# Altium PCB Tracking-Car.PcbDoc
Units mil, origin at the board's own origin, x right, y up, seen from the top; angles counter-clockwise.
Board outline 1945 x 1955 mil, 2 copper layers (Top Layer, Bottom Layer); 45 components, 45 nets, 193 pads, 18 vias.
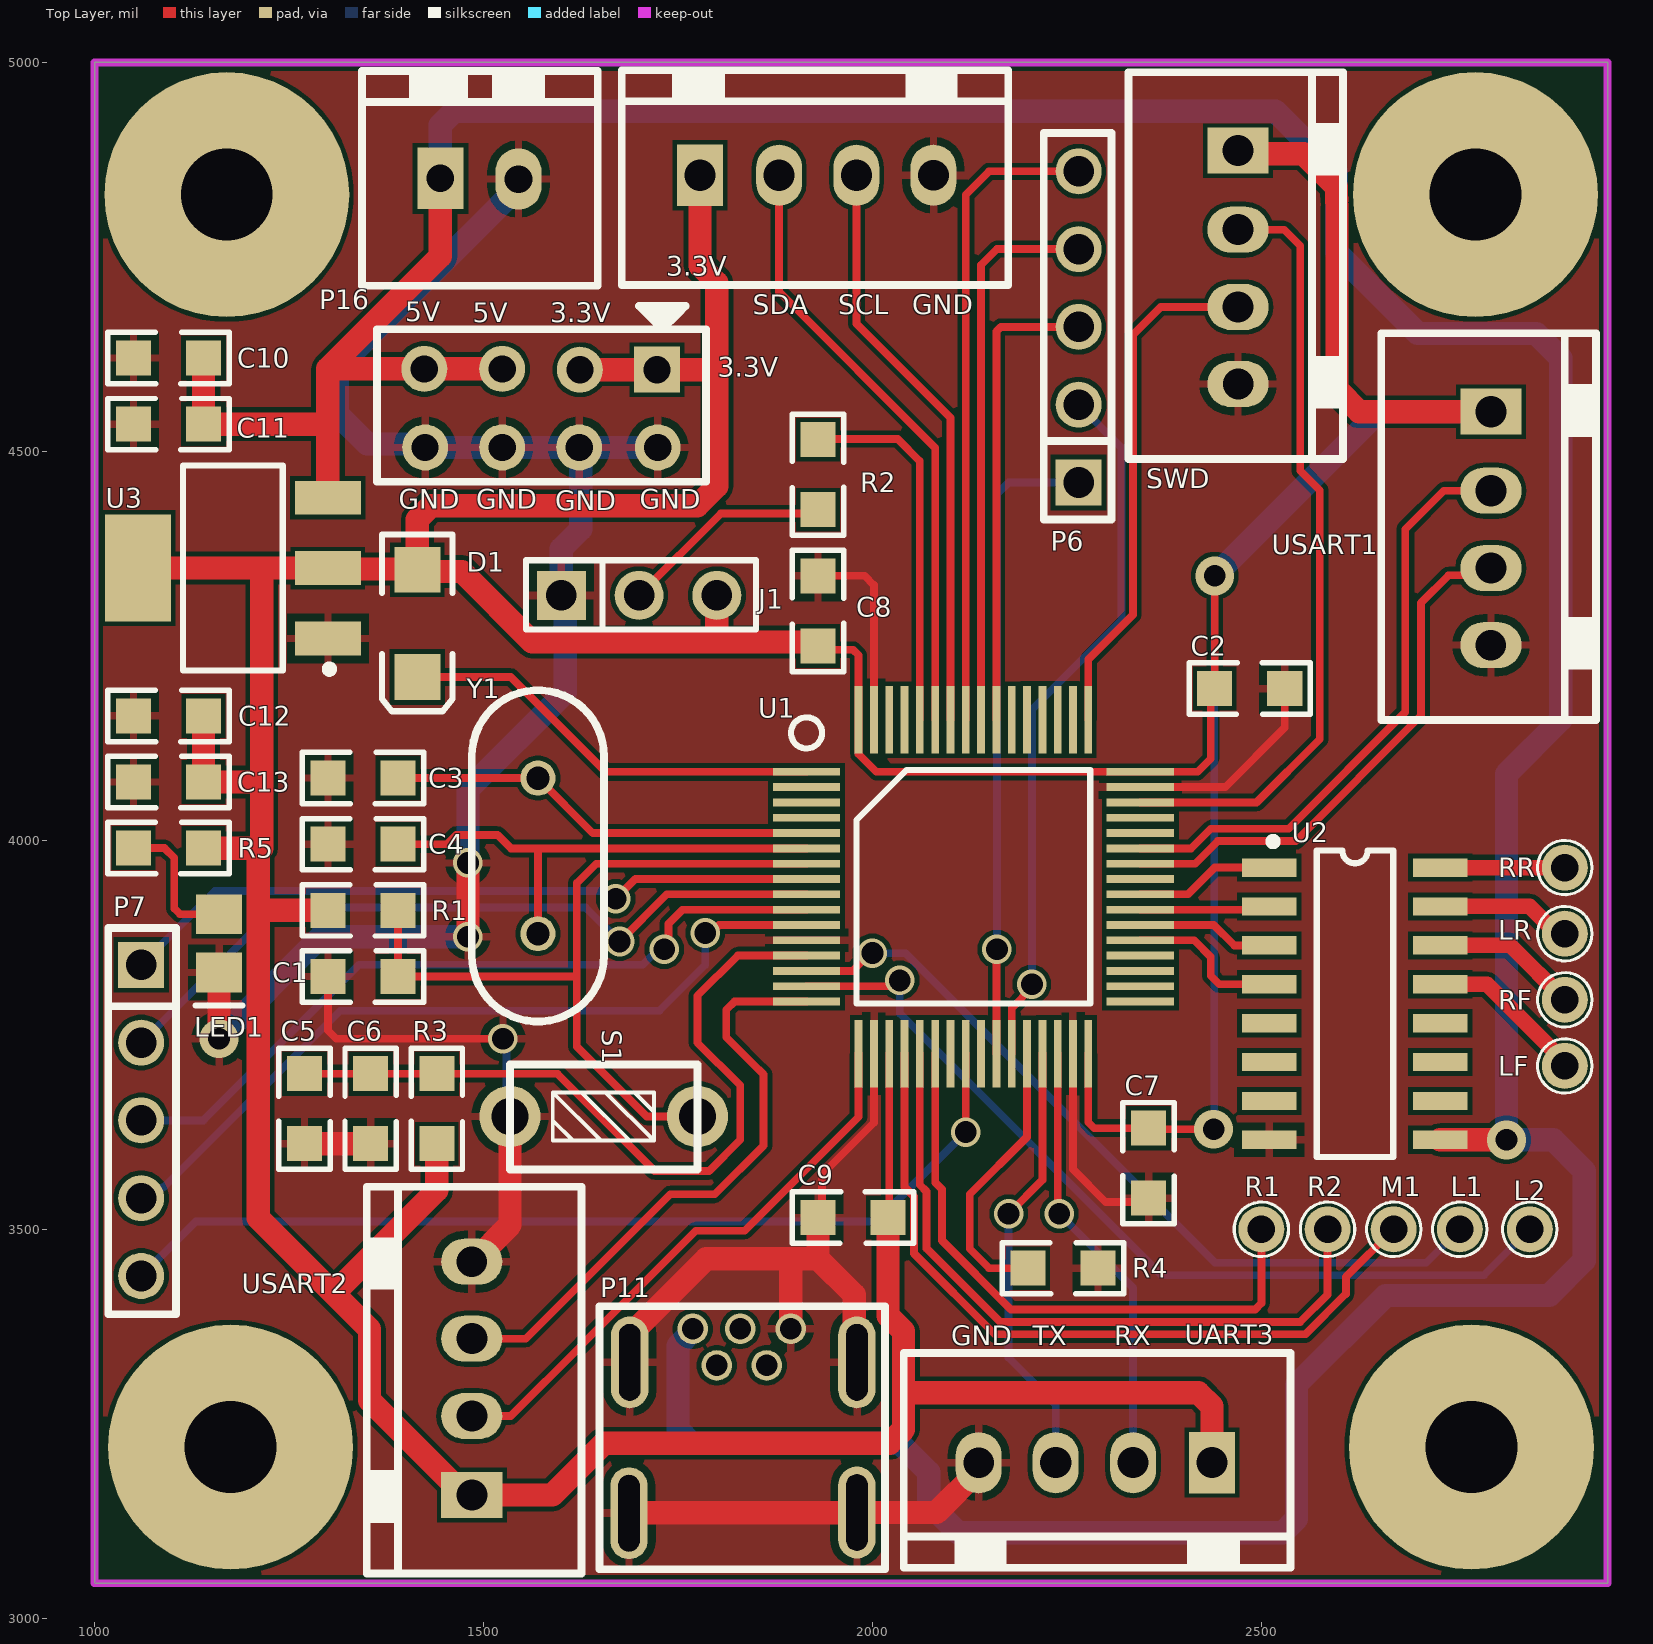
[diagram p0: Top Layer view]
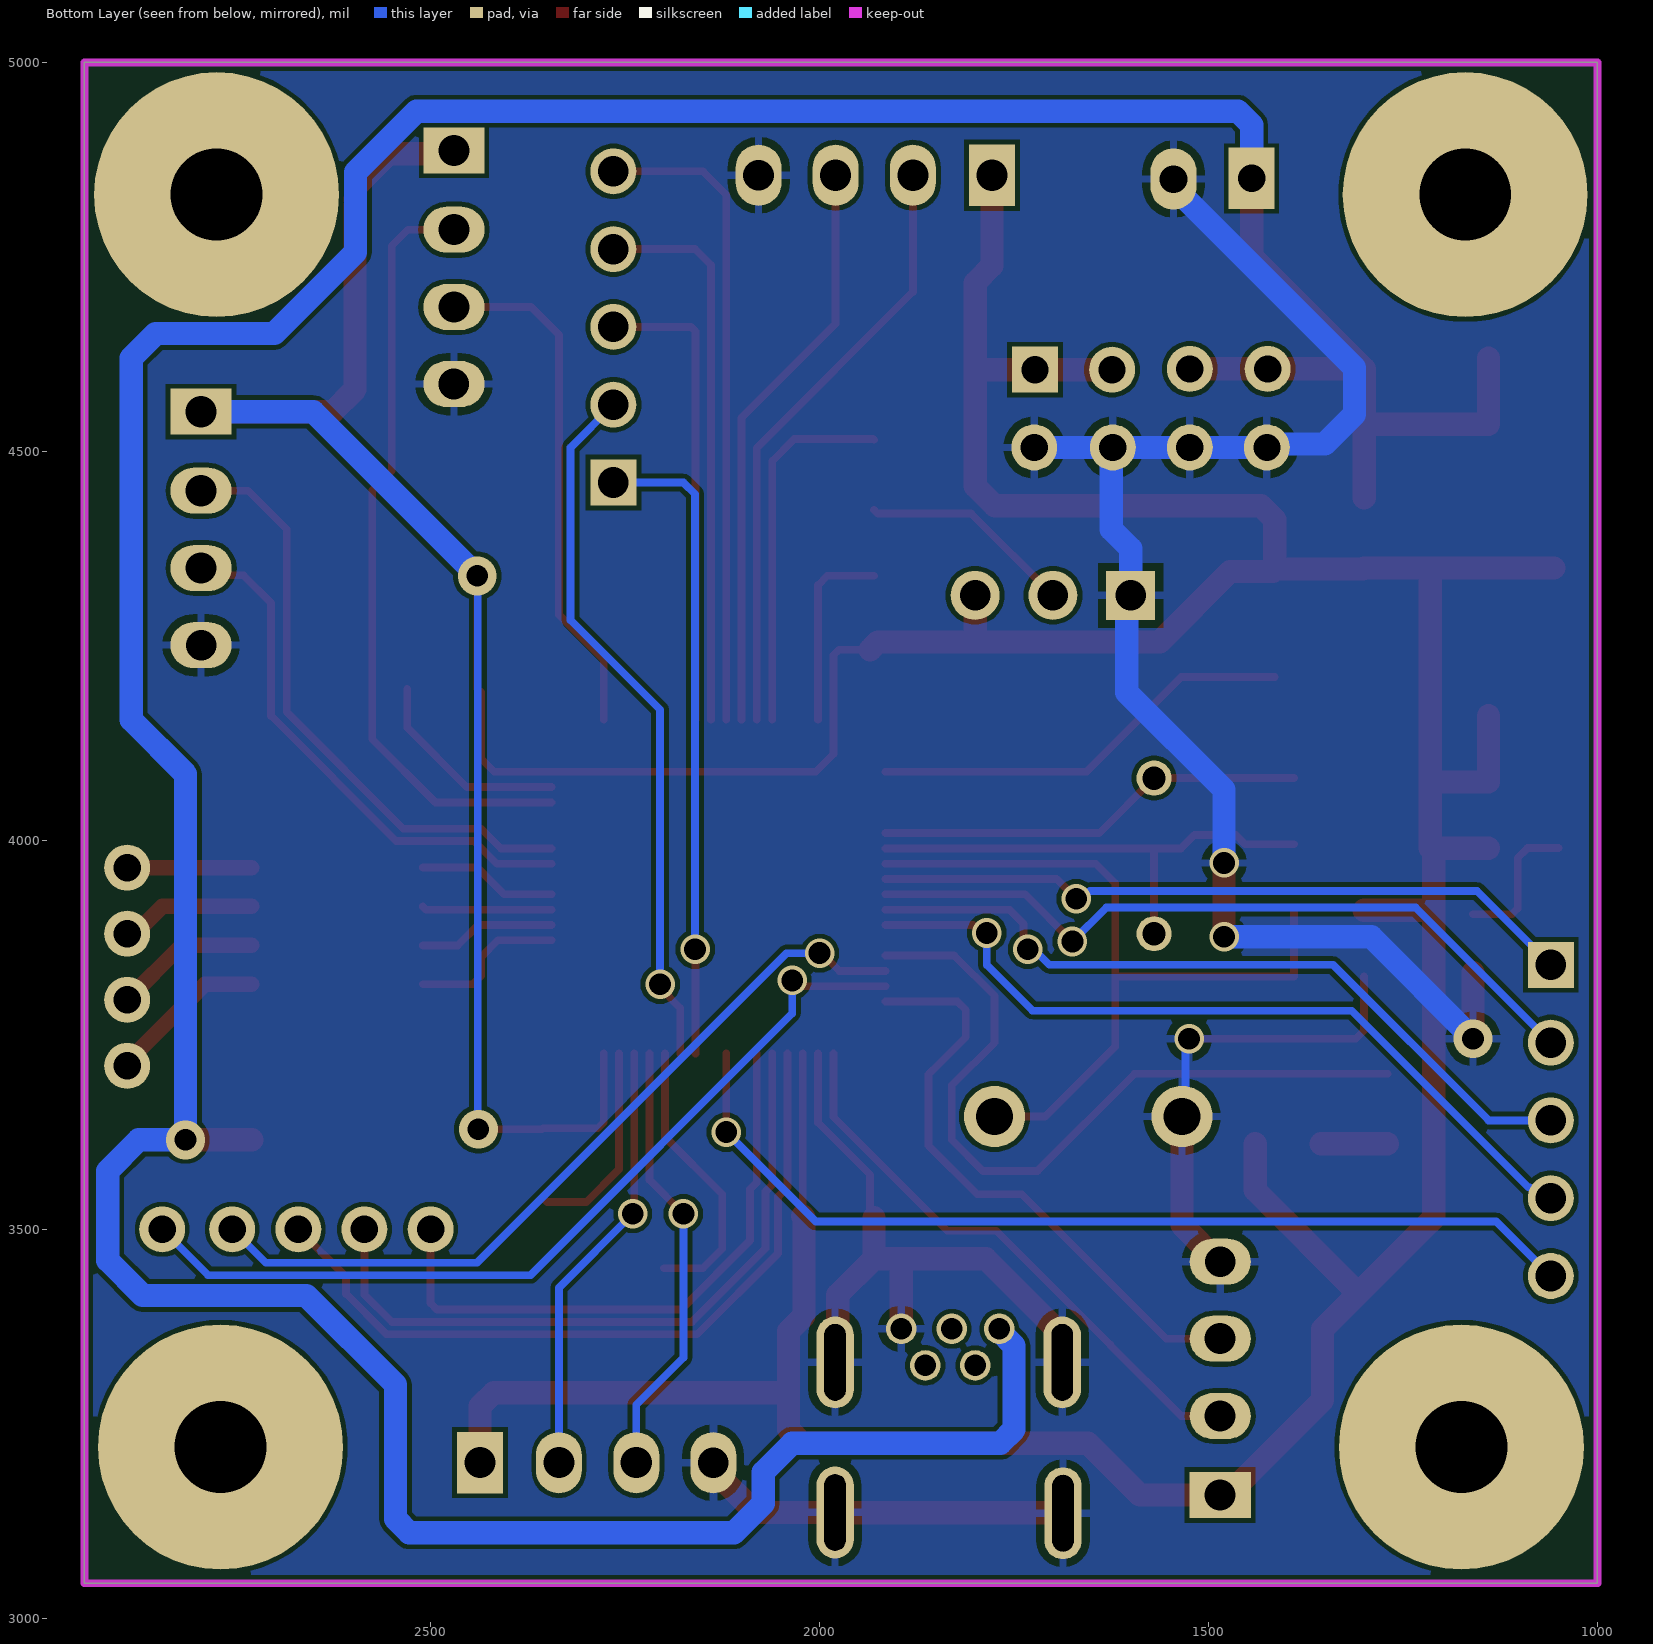
[diagram p1: Bottom Layer view, seen from below]

## Layer stack, top to bottom
Top Solder: solder mask 0.4, Solder Resist, Dk 3.5
Top Layer: signal copper 1.4
Dielectric 1: dielectric 12.6, FR-4, Dk 4.8
Bottom Layer: signal copper 1.4
Bottom Solder: solder mask 0.4, Solder Resist, Dk 3.5

## Board outline
1000,3045 1000,5000 2945,5000 2945,3045

## Design rules (kind name [scope] priority, off if disabled: settings)
Clearance [All] p1: gap=6 ignorepadtopadclearanceinfootprint=FALSE
HoleSize [All] p1: absolutevalues=TRUE maxlimit=900 minlimit=1 maxpercent=80.000 minpercent=20.000
MinimumSolderMaskSliver [All] p1: minsoldermaskwidth=0
PolygonConnect [All] p1: connectstyle=Relief reliefconductorwidth=10 reliefentries=4 polygonreliefangle="90 Angle" airgapwidth=10
RoutingVias [All] p1: holewidth=28 width=38 viastyle="Through Hole" minholewidth=28 minwidth=50 maxholewidth=28 maxwidth=50
SilkToSilkClearance [All] p1: silktosilkclearance=0
SilkToSolderMaskClearance [IsPad] p1: minsilkscreentomaskgap=0 clearancetoexposedcopper=TRUE
SolderMaskExpansion [All] p1: expansion=4 istentingtop=FALSE
Width 3.3V [InNet('3.3V')] p1: maxlimit=40 minlimit=10 preferedwidth=20 minimp=50.000000 maximp=50.000000 favimp=50.000000
Width 5V [InNet('5V')] p2: maxlimit=40 minlimit=10 preferedwidth=20 minimp=50.000000 maximp=50.000000 favimp=50.000000
Width GND [InNet('GND')] p3: maxlimit=40 minlimit=10 preferedwidth=20 minimp=50.000000 maximp=50.000000 favimp=50.000000
Width [All] p4: maxlimit=40 minlimit=10 preferedwidth=10
26 further rules are at their usual default settings.

## Components (designator, comment, footprint, x,y, rotation, side; value= is the part's Value field where it differs from the comment)
3.3V "XH2.54-4" VH2.54_4 1778.43,4855 r180 top (schematic designator P2)
5V "双排插针 2.54 2*4" "双排插针 2.54 2*4" 1724,4605 r270 top (schematic designator P13)
C1 "104" 0805 1300,3825 r0 top
C2 "104" 0805 2530,4195 r180 top
C3 "22P" 0805 1300,4080 r0 top
C4 "22P" 0805 1300,3995 r0 top
C5 "10uF" 0805 1270,3700 r270 top
C6 "104" 0805 1355,3700 r270 top
C7 "104" 0805 2355,3630 r270 top
C8 "104" 0805 1930,4250 r90 top
C9 "104" 0805 2020,3515 r180 top
C10 "10uF" 0805 1050,4620 r0 top
C11 "104" 0805 1050,4535 r0 top
C12 "10uF" 0805 1050,4160 r0 top
C13 "104" 0805 1050,4075 r0 top
D1 "1N4148" "二极管 贴片 IN4148" 1415,4347.8 r270 top
J1 "跳线" "单排插针 2.54 1*3" 1600,4315 r0 top
L1 "TEST" 焊盘 2755,3500 r0 top (schematic designator P14)
L2 "TEST" 焊盘 2845,3500 r0 top (schematic designator P15)
LED1 "红色" LED0805 1160,3905 r270 top
LF "TEST" 焊盘 2890,3710 r0 top (schematic designator P12)
LR "TEST" 焊盘 2890,3880 r0 top (schematic designator P9)
M1 "TEST" 焊盘 2670,3500 r0 top (schematic designator P17)
P6 "2.54 1*5" "单排插针 2.54 1*5" 2265,4460 r90 top
P7 "2.54 1*5" "单排插针 2.54 1*5" 1060,3840 r270 top
P11 "USB-MINI座" "USB MINI DIP" 1769,3372 r90 top
P16 "XH2.54-2" VH2.54_2 1444.61,4850.98 r180 top
R1 "10K" 0805 1300,3910 r0 top
R1 "TEST" 焊盘 2500,3500 r0 top (schematic designator P19)
R2 "100K" 0805 1930,4425 r90 top
R2 "TEST" 焊盘 2585,3500 r0 top (schematic designator P18)
R3 "10R" 0805 1440,3700 r270 top
R4 "100K" 0805 2200,3450 r0 top
R5 "100K" 0805 1050,3990 r0 top
RF "TEST" 焊盘 2890,3795 r0 top (schematic designator P10)
RR "TEST" 焊盘 2890,3965 r0 top (schematic designator P8)
S1 "key" "按键 轻触  6*3" 1534,3645 r90 top
SWD "XH2.54-4" VH2.54_4 2470,4886.57 r90 top (schematic designator P1)
U1 "STM32F103RCT6" LQFP64 1915.28,4088.07 r0 top
U2 "贴片芯片 ULN2003A" SOIC16 2515,3965 r270 top
U3 "SPX1117M3-3.3" SOT223 1299.95,4259 r90 top
UART3 "XH2.54-4" VH2.54_4 2436.57,3200 r0 top (schematic designator P5)
USART1 "XH2.54-4" VH2.54_4 2795,4551 r90 top (schematic designator P4)
USART2 "XH2.54-4" VH2.54_4 1485,3158.43 r270 top (schematic designator P3)
Y1 "0" "晶振 BCY-W2/E4.7" 1570,3880 r90 top

## Footprints (in the part's own frame and the unit in brackets; to place one, negate y for a bottom-side part, rotate by r counter-clockwise, add the part's x,y. Pads: shape width x height; smd on the part's side, far side on the other; paste and mask are expansions set on the pad)
0805 [mil]
  rect 45x45 smd: 1(0,0) 2(90,0)
  silkscreen extent -33,-33 123,33
LED0805 [mm] "Chip Capacitor; Body 2.0 x 1.2 mm (LxW typ)"
  rect 1.3x1.5 smd: 1(0,0) 2(1.9,0)
  silkscreen extent 2.98,-0.76 2.98,0.76
LQFP64 [mm]
  rect 2.2x0.254 smd: 1(0,0) 2(0,-0.5) 3(0,-1) 4(0,-1.5) 5(0,-2) 6(0,-2.5) 7(0,-3) 8(0,-3.5) 9(0,-4) 10(0,-4.5) 11(0,-5) 12(0,-5.5) 13(0,-6) 14(0,-6.5) 15(0,-7) 16(0,-7.5) 33(10.9,-7.5) 34(10.9,-7) 35(10.9,-6.5) 36(10.9,-6) 37(10.9,-5.5) 38(10.9,-5) 39(10.9,-4.5) 40(10.9,-4) 41(10.9,-3.5) 42(10.9,-3) 43(10.9,-2.5) 44(10.9,-2) 45(10.9,-1.5) 46(10.9,-1) 47(10.9,-0.5) 48(10.9,0)
  rect 0.254x2.2 smd: 17(1.7,-9.2) 18(2.2,-9.2) 19(2.7,-9.2) 20(3.2,-9.2) 21(3.7,-9.2) 22(4.2,-9.2) 23(4.7,-9.2) 24(5.2,-9.2) 25(5.7,-9.2) 26(6.2,-9.2) 27(6.7,-9.2) 28(7.2,-9.2) 29(7.7,-9.2) 30(8.2,-9.2) 31(8.7,-9.2) 32(9.2,-9.2) 49(9.2,1.7) 50(8.7,1.7) 51(8.2,1.7) 52(7.7,1.7) 53(7.2,1.7) 54(6.7,1.7) 55(6.2,1.7) 56(5.7,1.7) 57(5.2,1.7) 58(4.7,1.7) 59(4.2,1.7) 60(3.7,1.7) 61(3.2,1.7) 62(2.7,1.7) 63(2.2,1.7) 64(1.7,1.7)
  silkscreen extent -0.51,-7.56 9.26,1.78
SOIC16 [mil] "Small Outline; 16 Leads; Body Width 3.9 mm; Pitch 1.27 mm"
  rect 23.62x70 smd: 1(0,-5) 2(50,-5) 3(100,-5) 4(150,-5) 5(200,-5) 6(250,-5) 7(300,-5) 8(350,-5) 9(350,215) 10(300,215) 11(250,215) 12(200,215) 13(150,215) 14(100,215) 15(50,215) 16(0,215)
  silkscreen extent -38,-5 372,155
SOT223 [mm] "SOT-223/SC-73; 4 Leads; Body 6.7 x 7.3 mm, inc. leads (LxW max)"
  rect 1.1x2.15 smd: 1(0.011,-0.001) 2(2.311,-0.001) 3(4.611,-0.001)
  rect 3.5x2.15 smd: 4(2.311,6.199)
  silkscreen extent -1.11,-0.18 5.66,4.72
"USB MINI DIP" [mm]
  round 1 hole 0.7: 1(0,0) 2(-1.194,-0.787) 3(0,-1.549) 4(-1.194,-2.413) 5(0,-3.2)
  oval 3x1.22 hole 0.7 slot 2.5 at 0 deg: 6(-1.093,-5.36) 7(-5.995,-5.36) 8(-1.093,2.057) 9(-6.02,2.082)
  silkscreen extent -7.85,-6.27 0.74,3.05
VH2.54_2 [mm]
  rect 1.5x2 hole 0.9: 1(0,0)
  oval 1.5x2 hole 0.9: 2(-2.55,0.025)
  silkscreen extent -5.14,-3.51 2.56,3.51
VH2.54_4 [mm]
  rect 1.5x2 hole 1.016: 1(0,0)
  oval 1.5x2 hole 1.016: 2(-2.58,0) 3(-5.105,0)
  oval 1.5x2 hole 1: 4(-7.62,0)
  silkscreen extent -10.06,-3.43 2.56,3.58
"二极管 贴片 IN4148" [mm] "SMT LED; 2 Flat Leads"
  rect 1.5x1.5 smd: 1(0,0) 2(3.5,0)
  silkscreen extent -1.15,-1.15 4.62,1.15
"单排插针 2.54 1*3" [mm]
  rect 1.6x1.6 hole 1: 1(0,0)
  round 1.6 hole 1: 2(2.54,0) 3(5.08,0)
  silkscreen extent -1.15,-1.12 6.36,1.14
"单排插针 2.54 1*5" [mm]
  rect 1.5x1.5 hole 1: 1(0,0)
  round 1.5 hole 1: 2(2.54,0) 3(5.08,0) 4(7.62,0) 5(10.16,0)
  silkscreen extent -1.2,-1.07 11.41,1.14
"双排插针 2.54 2*4" [mm]
  rect 1.5x1.5 hole 0.889: 1(0,-0.025)
  round 1.5 hole 0.889: 2(2.54,0) 3(0,-2.54) 4(2.54,-2.565) 5(-0.025,-5.08) 6(2.54,-5.08) 7(-0.025,-7.62) 8(2.54,-7.595)
  silkscreen extent -2.08,-9.17 3.66,1.57
"按键 轻触  6*3" [mm]
  round 2 hole 1.2: 1(0,0) 2(0,-6.121)
  silkscreen extent -1.73,-6.12 1.7,0
"晶振 BCY-W2/E4.7" [mil] "Quartz Crystal, Thru-Hole; 2 Leads; Body 11.35 x 4.65 x 13.46 mm (LxWxH max)"
  round 45 hole 30: 1(0,0) 2(200,0)
  silkscreen extent -113,-85 313,85
焊盘 [mm]
  round 1.5 hole 0.9: 1(0,0)
  silkscreen extent -0.89,-0.89 0.89,0.89

## Part data
3.3V SWD UART3 USART1 USART2: library part "联结件 XH2.54-4", 单位=套, 名称=联结件, 封装=XH2.54-4
5V: library part "联结件 双排插针 2.54 2*4", 单位=个, 名称=联结件, 封装=直插
C1 C2 C3 C4 C5 C6 C7 C8 C9 C10 C11 C12 C13: library part "电容 贴片 0805", 单位=个, 名称=贴片电容, 封装=0805
D1: library part "二极管 贴片 1N4148", 单位=个, 名称=贴片二极管, 封装=贴片
J1: library part "联结件 跳线端子 2.54-3", 单位=个, 名称=跳线插针, 封装=直插
L1 L2 LF LR M1 R1 R2 RF RR: library part 焊盘, 单位=个, 名称=焊盘, 封装=直插
LED1: library part "二极管 贴片发光 0805", 单位=个, 名称=贴片发光二极管, 封装=0805
P6 P7: library part "联结件 单排插针 2.54 1*5", 单位=片, 名称=单排插针, 封装=DIP
P11: library part "联结件 USB-MINI座", 单位=个, 名称=联结件, 封装=440068
P16: library part "联结件 XH2.54-2", 单位=套, 名称=联结件, 封装=VH3.96-2
R1 R2 R3 R4 R5: library part "电阻 贴片 0805", 单位=个, 名称=贴片电阻, 封装=0805
S1: library part "按键 轻触 3*6", 单位=个, 名称=开关, 封装="直插 12*12*12"
U1: library part "贴片芯片 STM32F103RCT6", "单片机", 单位=片, 名称=芯片, 封装=LQFP64
U3: library part "贴片芯片 SPX1117M3-3.3", "LDO", 单位=个, 名称=贴片芯片, 封装=SOT223
Y1: library part "晶振 直插矮", 单位=个, 名称=晶振, 封装=直插矮
U2: 单位=片, 名称=贴片芯片, 封装=SOIC16

## Free pads (board coordinates)
  round 314.96 hole 118.11: 3(1170,4830) 4(2775,4830) 5(1175,3220) 6(2770,3220)

## Via types
v1: diameter 38, hole 28, Top Layer to Bottom Layer, 14 vias
v2: diameter 50, hole 28, Top Layer to Bottom Layer, 4 vias

## Nets (pads, with @x,y where several pads share a name; then routed paths per layer and width w, separated by ;. In a path a pad name is that pad's centre, name@x,y a point inside that pad or via, vN(x,y) a via of type N, cw(c..) or ccw(c..) an arc to the next point about the centre after c; other vN are vias at no path point)
3.3V: 3.3V.1 5V.1 5V.3 C2.2 C7.1 C8.1 C9.1 C12.2 C13.2 D1.1 J1.3 R1.1@1300,3910 R3.2 R5.2 SWD.1 U1.19 U1.32 U1.48 U1.64 U3.2 U3.4 UART3.1 USART1.1 USART2.1 | length 8383.8
  Top Layer w10: C8.1@1935,4245 1975,4245 1982.21,4237.79 U1.64 1982.21,4110.82 2004.95,4088.07 U1.48 2418.07,4088.07 2435,4105 2435,4190 C2.2 v2(2440,4340) ; C9.1@2021.58,3516.57 U1.19 ; U1.32 2277.48,3637.52 2285,3630 C7.1 2356.41,3628.59 v2(2438.59,3628.59)
  Top Layer w30: U3.4 1215,4350 ; R5.2 1215,3990 1215,4075 ; C12.2 C13.2 1215,4075 ; 1210.53,3990 1210.53,3910 ; R1.1@1300,3910 1210.53,3910 ; R3.2 1440,3550 1307.5,3417.5 ; 5V.3 5V.1 1795,4605 1800,4610 ; 3.3V.1 1778.43,4738.43 1800,4716.85 1800,4610 ; J1.3 1800,4255 ; C8.1@1935,4245 C8.1 1925,4255 1800,4255 ; C9.1@2021.58,3516.57 C9.1 2020,3388.79 2040,3368.79 2040,3290 ; UART3.1 2436.57,3272.43 2419,3290 2040,3290 ; SWD.1 2494.37,4882.57 2554.1,4882.57 2579.45,4857.23 2596.53,4840.14 2596.53,4832.11 ccw(c2775,4830) 2597.19,4814.5 2597.19,4579.48 2625.67,4551 USART1.1 ; 1210.53,3910 1210.53,3514.47 1307.5,3417.5 ; 1215,4075 1215,4350 ; 1215,4350 U3.2 1301.1,4348.9 1413.9,4348.9 D1.1 ; 1307.5,3417.5 1353.48,3371.52 1353.48,3280.1 1475.16,3158.43 USART2.1 1588.43,3158.43 1655,3225 2022.43,3225 2040,3242.57 2040,3290 ; D1.1 1417.11,4345.68 1471.95,4345.68 1562.64,4255 1800,4255 ; D1.1 1415,4412.43 1432.57,4430 1775,4430 1800,4455 1800,4610
  Bottom Layer w10: v2(2438.59,3628.59) 2439.3,3629.3 2439.3,4339.3 v2(2440,4340)
  Bottom Layer w30: v2(2440,4340) 2651,4551 USART1.1
5V: 5V.5 5V.7 C10.2 C11.2 P11.1 P16.1 U2.9 U3.3 | length 5625.1
  Top Layer w30: C10.2 C11.2 1297.78,4535 1300,4532.78 ; U3.3 1300,4532.78 ; P16.1 1444.61,4750.61 1300,4606 ; 5V.5 1300,4606 ; U2.9 v2(2815,3615) ; 1300,4532.78 1300,4606
  Bottom Layer w30: P16.1 1444.61,4919.53 1462.18,4937.1 2518.07,4937.1 2596.52,4858.65 2596.52,4756.07 2701.07,4651.52 2853.48,4651.52 2885,4620 2885,4155.21 2815,4085.21 v2(2815,3615) 2875,3615 2915,3575 2915,3460 2870,3415 2660,3415 2545,3300 2545,3127.57 2527.43,3110 2110,3110 2072.5,3147.5 2072.5,3187.5 2035,3225 1767.57,3225 1750,3242.57 1750,3350.46 1769,3369.46 P11.1
BOOT0: R2.2 U1.60 | length 475.5
  Top Layer w10: R2.2 1930.86,4515.86 2032.57,4515.86 2060.95,4487.49 U1.60
GND: 3.3V.4 5V.2 5V.4 5V.6 5V.8 C1.1 C2.1 C3.1 C4.1 C5.2 C6.2 C7.2 C8.2 C9.2 C10.1 C11.1 C12.1 C13.1 J1.1 LED1.2 P11.5 P11.6 P11.7 P11.8 P11.9 P16.2 R4.2 S1.1 SWD.4 U1.12 U1.18 U1.31 U1.47 U1.63 U2.8 U3.1 UART3.4 USART1.4 USART2.4 | length 4797.1
  Top Layer w10: C1.1 1300,3755.86 1310.86,3745 v1(1525,3745) ; C9.2 1935,3520 1935,3570 2001.89,3636.89 U1.18 ; C8.2 1990,4340 2001.89,4328.11 U1.63 ; U1.31 2257.8,3577.2 2300,3535 2350,3535 C7.2 ; U1.47 2453.39,4068.39 2530,4145 C2.1
  Top Layer w30: v2(1160,3745) LED1.2 ; C5.2 C6.2 ; v1(1480,3876) v1(1480,3971) ; USART2.4 1486.98,3458.43 1534,3505.45 S1.1 ; P11.9 1687.52,3135.48 1979.53,3135.48 P11.7 2082.39,3135.98 2136.57,3190.16 UART3.4 ; P11.8 1688.02,3364.01 1786.28,3462.27 1895,3462.27 ; P11.5 1895,3462.27 ; C9.2 1930,3462.27 ; P11.6 1976.56,3332.43 1976.56,3415.71 1930,3462.27 ; 1895,3462.27 1930,3462.27
  Bottom Layer w10: v1(1525,3745) 1529.5,3740.5 1529.5,3649.5 S1.1
  Bottom Layer w30: v2(1160,3745) 1291,3876 v1(1480,3876) ; v1(1480,3971) 1480,4065 1605,4190 1605,4310 J1.1 1600,4375 1625,4400 1625,4503 5V.4 ; P16.2 1545,4840.16 1312.43,4607.58 1312.43,4547.57 1350.47,4509.53 1420.47,4509.53 5V.8 5V.6 5V.4 ; 5V.2 5V.4
I2C_SCL: 3.3V.3 U1.58 | length 750.1
  Top Layer w10: 3.3V.3 1979.43,4664.04 2100.32,4543.15 U1.58
I2C_SDA: 3.3V.2 U1.59 | length 783.1
  Top Layer w10: 3.3V.2 1880,4705 2080.63,4504.37 U1.59
MOTOR_LF: U1.37 U2.4 | length 203.2
  Top Layer w10: U1.37 2413.46,3871.54 2435,3850 2435,3825.86 2445.86,3815 U2.4
MOTOR_LR: U1.39 U2.2 | length 167.3
  Top Layer w10: U1.39 2505.91,3910.91 U2.2
MOTOR_RF: U1.38 U2.3 | length 176.5
  Top Layer w10: U1.38 2438.78,3891.22 2465,3865 U2.3
MOTOR_RR: U1.40 U2.1 | length 179.8
  Top Layer w10: U1.40 2405.59,3930.59 2440,3965 U2.1
NetC1_2: C1.2 R1.2 S1.2 U1.7 | length 1022.9
  Top Layer w10: R1.2 C1.2 1620,3825 ; S1.2 1710,3645 1620,3735 1620,3825 ; U1.7 1644.96,3969.96 1620,3945 1620,3825
NetC3_2: C3.2 U1.5 Y1.2 | length 554.5
  Top Layer w10: C3.2 Y1.2 1640.67,4009.33 U1.5
NetC4_2: C4.2 U1.6 Y1.1 | length 647.1
  Top Layer w10: C4.2 1453.09,3995 1465.09,4007 1518,4007 1535.35,3989.65 1570,3989.65 ; Y1.1 1570,3989.65 ; U1.6 1570,3989.65
NetC5_1: C5.1 C6.1 R3.1 U1.13 | length 997.9
  Top Layer w10: C5.1 C6.1 R3.1 1595,3700 1720,3575 1790,3575 1830,3615 1830,3685 1775,3740 1775,3800 1826.85,3851.85 U1.13
NetD1_2: D1.2 U1.1 | length 550.8
  Top Layer w10: D1.2 1535,4210 1656.93,4088.07 U1.1
NetJ1_2: J1.2 R2.1@1930,4425 | length 275.6
  Top Layer w10: J1.2 1805,4420 1925,4420 R2.1@1930,4425
NetLED1_1: LED1.1 R5.1 | length 183.3
  Top Layer w10: R5.1 1090,3990 1102.49,3977.51 1102.49,3912.51 1110,3905 LED1.1
NetP8_1: RR.1 U2.16 | length 160
  Top Layer w20: U2.16 RR.1
NetP9_1: LR.1 U2.15 | length 174.5
  Top Layer w20: U2.15 2845,3915 2880,3880 LR.1
NetP10_1: RF.1 U2.14 | length 189
  Top Layer w20: U2.14 2820,3865 RF.1
NetP12_1: LF.1 U2.13 | length 206.4
  Top Layer w20: U2.13 2790,3815 2890,3715 LF.1
NetR4_1: R4.1 U1.28 | length 366.8
  Top Layer w10: U1.28 2198.74,3618.74 2125,3545 2125,3475 2150,3450 R4.1
PB0: P6.1 U1.26 | length 830.6
  Top Layer w10: U1.26 2159.37,3859.37 v1(2160,3860)
  Bottom Layer w10: v1(2160,3860) 2160,4445 2175,4460 P6.1
PB1: P6.2 U1.27 | length 915.3
  Top Layer w10: U1.27 2179.05,3784.38 2205,3810.32 v1(2205,3815)
  Bottom Layer w10: v1(2205,3815) 2205,4167.91 2320,4282.91 2320,4505 P6.2
PB3: P6.3 U1.55 | length 607.2
  Top Layer w10: U1.55 2159.37,4654.14 2165.23,4660 P6.3
PB4: P6.4 U1.56 | length 718.4
  Top Layer w10: U1.56 2139.68,4739.68 2160,4760 P6.4
PB5: P6.5 U1.57 | length 832.4
  Top Layer w10: U1.57 2120,4830 2150,4860 P6.5
PC0: P7.1 U1.8 | length 909.2
  Top Layer w10: v1(1670,3925) 1695.28,3950.28 U1.8
  Bottom Layer w10: P7.1 1155,3935 1652.42,3935 1662.42,3925 v1(1670,3925)
PC1: P7.2 U1.9 | length 970.3
  Top Layer w10: v1(1675,3870) 1735.59,3930.59 U1.9
  Bottom Layer w10: P7.2 1233.5,3913.5 1631.5,3913.5 v1(1675,3870)
PC2: P7.3 U1.10 | length 983.6
  Top Layer w10: v1(1732.42,3860) 1737.78,3865.36 1737.78,3892.78 1755.91,3910.91 U1.10
  Bottom Layer w10: P7.3 1140,3640 1340,3840 1704.85,3840 1724.85,3860 v1(1732.42,3860)
PC3: P7.4 U1.11 | length 1024.8
  Top Layer w10: v1(1785,3880.91) 1792.58,3880.91 1802.89,3891.22 U1.11
  Bottom Layer w10: P7.4 1073.27,3540 1087.26,3553.99 1088.99,3553.99 1316,3781 1726.09,3781 1785,3839.91 v1(1785,3880.91)
PC4: P7.5 U1.24 | length 1237.5
  Top Layer w10: v1(2120,3625) U1.24
  Bottom Layer w10: P7.5 1130,3510 2005,3510 v1(2120,3625)
SWCLK: SWD.3 U1.49 | length 668.6
  Top Layer w10: U1.49 2277.48,4232.48 2335,4290 2335,4650 2370.57,4685.57 SWD.3
SWDIO: SWD.2 U1.46 | length 997.4
  Top Layer w10: U1.46 2493.7,4048.7 2575,4130 2575,4450 2550,4475 2550,4764.14 2529.14,4785 SWD.2
Tracking_L1: L1.1 U1.14 | length 1031.9
  Top Layer w10: U1.14 1974.75,3832.17 1997.58,3855 v1(2000,3855)
  Bottom Layer w10: v1(2000,3855) 2042.43,3855 2440.43,3457 2712,3457 L1.1
Tracking_L2: L2.1 U1.15 | length 1139.1
  Top Layer w10: U1.15 2019.9,3812.48 2027.42,3820 v1(2035,3820)
  Bottom Layer w10: v1(2035,3820) 2035,3777.57 2371.57,3441 2786,3441 L2.1
Tracking_Mi: M1.1 U1.20 | length 990.2
  Top Layer w10: U1.20 2041.26,3554.3 2053.5,3542.06 2053.5,3468.87 2157.37,3365 2556.63,3365 2608.62,3416.99 2608.62,3438.62 M1.1
Tracking_R1: R1.1@2500,3500 U1.22 | length 789.5
  Top Layer w10: U1.22 2080.63,3560.18 2089.32,3551.5 2089.32,3485.68 2178,3397 2492,3397 2500,3405 R1.1@2500,3500
Tracking_R2: R2.1@2585,3500 U1.21 | length 907.1
  Top Layer w10: U1.21 2060.95,3557.24 2069.5,3548.68 2069.5,3475.5 2164,3381 2550,3381 2585,3416 R2.1@2585,3500
U1_RX: U1.43 USART1.2 | length 778.7
  Top Layer w10: U1.43 2409.65,3989.65 2435,4015 2535,4015 2685,4165 2685,4400 2734.43,4449.43 USART1.2
U1_TX: U1.42 USART1.3 | length 692.9
  Top Layer w10: U1.42 2414.96,3969.96 2444,3999 2544,3999 2705,4160 2705,4305 2740.63,4340.63 2785.63,4340.63 USART1.3
U2_RX: U1.17 USART2.2 | length 738
  Top Layer w10: USART2.2 1535,3260 1626.76,3351.76 1626.76,3352.27 1772.73,3498.24 1835.68,3498.24 1982.2,3644.76 U1.17
U2_TX: U1.16 USART2.3 | length 779.7
  Top Layer w10: USART2.3 1554.43,3359.43 1740,3545 1797.37,3545 1860,3607.63 1860,3699.14 1854.14,3705 1854.04,3705 1812.17,3746.87 1812.17,3782.17 1822.8,3792.8 U1.16
U3_RX: U1.30 UART3.2 | length 566
  Top Layer w10: U1.30 2238.11,3521.89 v1(2240,3520)
  Bottom Layer w10: v1(2240,3520) 2335,3425 UART3.2
U3_TX: U1.29 UART3.3 | length 568.9
  Top Layer w10: v1(2175,3520) 2218.43,3563.43 U1.29
  Bottom Layer w10: v1(2175,3520) 2175,3335 2235.57,3274.43 UART3.3
pads on no net: P11.2 P11.3 P11.4 U1.2 U1.3 U1.4 U1.23 U1.25 U1.33 U1.34 U1.35 U1.36 U1.41 U1.44 U1.45 U1.50 U1.51 U1.52 U1.53 U1.54 U1.61 U1.62 U2.5 U2.6 U2.7 U2.10 U2.11 U2.12

## Polygon pours and split planes (outlines as drawn)
GND on Top Layer "GND_L01_P000" (solid, remove dead copper, pour order 0): 1000,3045 2945,3045 2945,5000 1000,5000
GND on Bottom Layer "GND_L02_P001" (solid, remove dead copper, pour order 1): 1000,3045 2945,3045 2945,5000 1000,5000

## Keep-outs
Keep-Out Layer:
  the board outline again, w10

## Silkscreen, mask and mechanical layers (free items; w line width, h text height)
Top Overlay:
  text "SDA" at 1846,4676 h25
  text "SCL" at 1956,4676 h25
  text "GND" at 2051,4676 h25
  text "5V" at 1486,4666 h25
  text "3.3V" at 1586,4666 h25
  text "3.3V" at 1801,4596 h25
  text "GND" at 1391,4426 h25
  text "GND" at 1491,4426 h25
  text "GND" at 1701,4426 h25
  text "GND" at 1592.31,4424.32 h25
  text "GND" at 2101,3351 h25
  text "TX" at 2206,3351 h25
  text "RX" at 2311,3351 h25